# Altium PCB DS-1+.PcbDoc
Units mm, origin at the board's own origin, x right, y up, seen from the top; angles counter-clockwise.
Board outline 78 x 52 mm, 2 copper layers (Top Layer, Bottom Layer), stack 1.571 mm thick; 54 components, 49 nets, 239 pads, 49 vias.
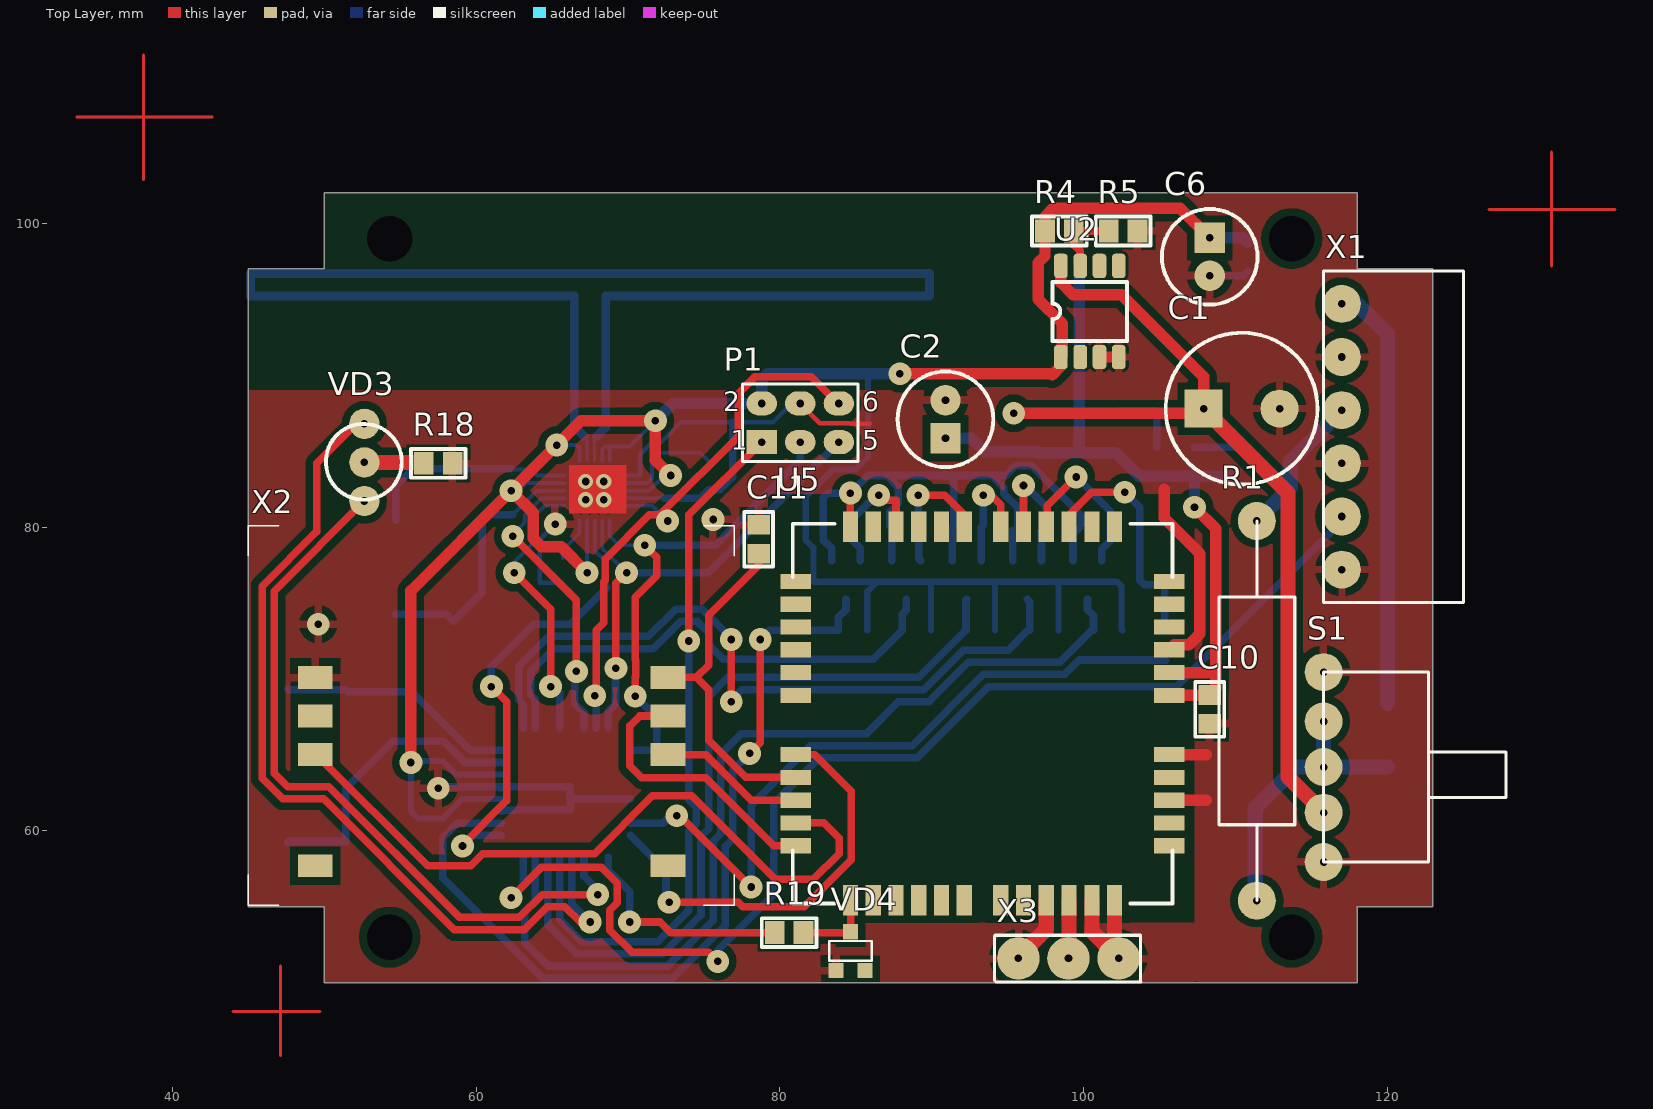
[diagram p0: Top Layer view]
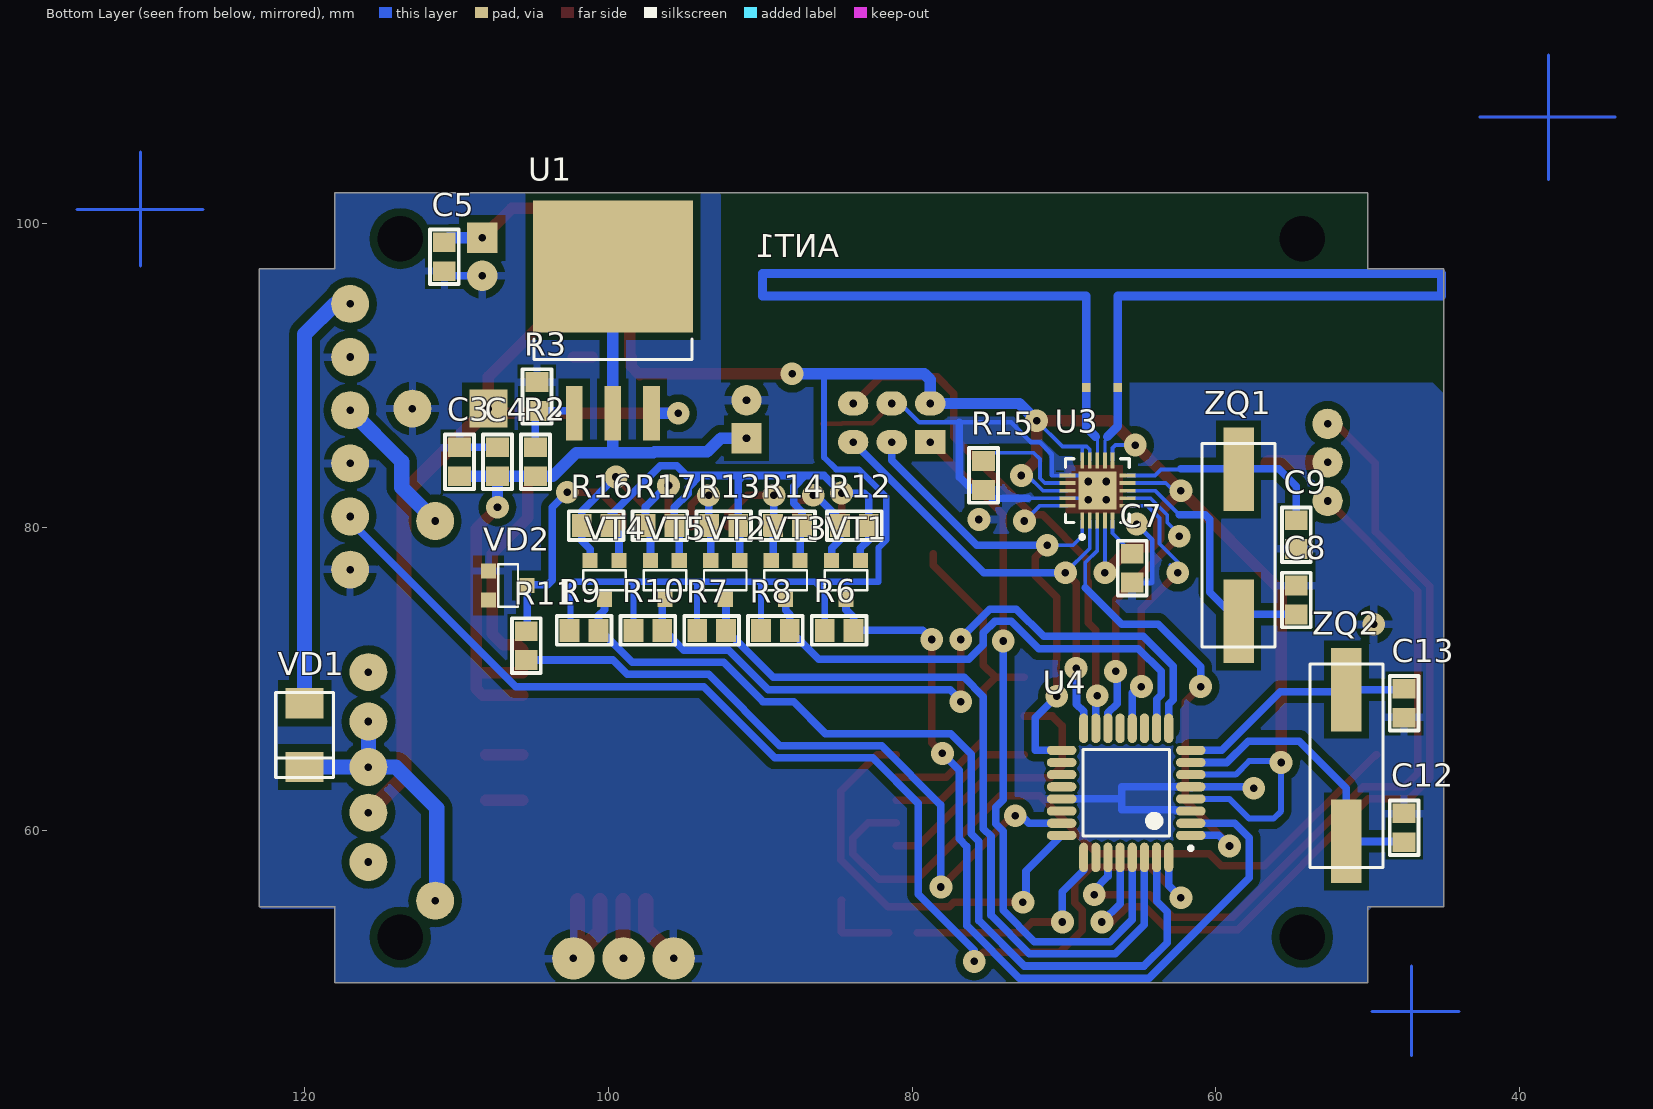
[diagram p1: Bottom Layer view, seen from below]

## Layer stack, top to bottom
Top Layer: signal copper 0.0356
Dielectric: core 1.5, FR-4, Dk 4.8
Bottom Layer: signal copper 0.0356

## Board outline
45,55 45,97 50,97 50,102 118,102 118,97 123,97 123,55 118,55 118,50 50,50 50,55

## Design rules (kind name [scope] priority, off if disabled: settings)
Clearance "Clearance_GND_VCC +3.3" [InNet('GND') vs InNet('VCC +3.3')] p1 off: gap=0.2
Clearance Clearance_U3_Trace [(IsTrack  And IsNet)  And InRegion(2421,2917 ,2905 ,3480) vs (IsTrack  And IsNet)  And InRegion(2421,2917 ,2905 ,3480)] p2: gap=0.2
Clearance Clearance_QFP_NET [InNet('SPI_MISO','SPI_MOSI','GND','VCC +3.3','TR_GDO2','TR_GDO0','SPI_SS','SPI_SCK','NetC8_1','NetC9_1','')  And InRegion(2421,2917 ,2905 ,3480) vs InNet('SPI_MISO','SPI_MOSI','GND','VCC +3.3','TR_GDO2','TR_GDO0','SPI_SS','SPI_SCK','NetC8_1','NetC9_1')  And InRegion(2421,2917 ,2905 ,3480)] p3: gap=0.2
Clearance Clearance_QFP_Pins [InComponent('U3','U4','U2') And IsPad] p4: gap=0.2
Clearance Clearance_GND [InPolygon] p5: gap=0.5
Clearance [All] p6: gap=0.3
ComponentClearance ComponentClearance_R1_C10 [InComponent('C10') vs InComponent('R1')] p1: gap=0 collisioncheckmode=3 verticalgap=0 showdistances=FALSE
ComponentClearance [All] p2: gap=0.3 collisioncheckmode=3 verticalgap=0.3 showdistances=FALSE
HoleSize [All] p1: absolutevalues=TRUE maxlimit=5 minlimit=0.3 maxpercent=80.000 minpercent=20.000
NetAntennae [All] p1: netantennaetolerance=50
PlaneConnect [All] p1: planeconnectstyle=Relief reliefexpansion=0.508 reliefentries=4 reliefconductorwidth=0.3 reliefairgap=0.3
PolygonConnect [All] p1: connectstyle=Relief reliefconductorwidth=0.5 reliefentries=4 polygonreliefangle="90 Angle"
RoutingCorners [All] p1: cornerstyle=45-Degree minsetback=2.54 maxsetback=5
RoutingVias [All] p1: holewidth=0.5 width=1.6 viastyle="Through Hole" minholewidth=0.3 minwidth=1.5 maxholewidth=1 maxwidth=2
ShortCircuit ShortCircuit_ANT1 [InComponent('ANT1')] p1: allowed=TRUE
ShortCircuit [All] p2: allowed=FALSE
SilkToSilkClearance [All] p1: silktosilkclearance=0.3
SilkscreenOverComponentPads [All] p1: minsilkscreentomaskgap=0.254
SolderMaskExpansion [All] p1: expansion=0.102
Width [All] p1: maxlimit=5 minlimit=0.2 preferedwidth=0.3
20 further rules are at their usual default settings.

## Components (designator, comment, footprint, x,y, rotation, side; value= is the part's Value field where it differs from the comment)
ANT1 "DIPOL 2.4GHz" ANT_DIPOL_2.4GHZ 67.495,89.8 r0 bottom
C1 "K50-35" CAP_POL_D10 110.4,87.8 r0 top
C2 "K50-35" CAP_POL_D6.3 90.9,87.1 r90 top
C3 "KONDENS_SMD" C0805 109.8,84.3 r90 bottom
C4 "KONDENS_SMD" C0805 107.3,84.3 r90 bottom
C5 "KONDENS_SMD" C0805 110.8,97.8 r270 bottom
C6 "K50-35" CAP_POL_D6.3 108.3,97.8 r270 top
C7 "KONDENS_SMD" C0805 65.5,77.3 r270 bottom
C8 "KONDENS_SMD" C0805 54.7,75.2 r90 bottom
C9 "KONDENS_SMD" C0805 54.7,79.5 r270 bottom
C10 "KONDENS_SMD" C0805 108.3,68 r270 top
C11 "KONDENS_SMD" C0805 78.6,79.2 r270 top
C12 "KONDENS_SMD" C0805 47.6,60.2 r90 bottom
C13 "KONDENS_SMD" C0805 47.6,68.4 r270 bottom
P1 "Header 3X2" HDR2X3 78.8,85.6 r0 top
R1 "KNP-200" "RESISTOR KNP-200" 111.4,80.4 r270 top
R2 "RES" C0805 104.8,84.3 r270 bottom
R3 "RES" C0805 104.7,88.6 r270 bottom
R4 "RES" C0805 98.4,99.5 r180 top
R5 "RES" C0805 102.6,99.5 r180 top
R6 "RES" C0805 84.8,73.2 r180 bottom
R7 "RES" C0805 93.2,73.2 r180 bottom
R8 "RES" C0805 89,73.2 r180 bottom
R9 "RES" C0805 101.6,73.2 r180 bottom
R10 "RES" C0805 97.4,73.2 r180 bottom
R11 "RES" C0805 105.4,72.2 r270 bottom
R12 "RES" C0805 83.8,80.1 r0 bottom
R13 "RES" C0805 92.4,80.1 r0 bottom
R14 "RES" C0805 88.2,80.1 r0 bottom
R15 "RES" C0805 75.3,83.4 r90 bottom
R16 "RES" C0805 100.8,80.1 r0 bottom
R17 "RES" C0805 96.6,80.1 r0 bottom
R18 "RES" C0805 57.5,84.2 r0 top
R19 "RES" C0805 80.6,53.3 r0 top
S1 "SS12F23" SS12F23 115.8,64.2 r270 top
U1 "LM1086CS-ADJ" TS3B_M 99.7,93.6 r90 bottom
U2 "LP2951" SOIC-8 98.5,91.2 r90 top
U3 "CC2500" VQFN20 67.8,82.4 r90 bottom
U4 "ATmega8A-AU" 32A_M 65.9,62.5 r0 bottom
U5 "WISMO 228" WISMO 81,76.4 r0 top
VD1 "10BQ100" SMB 120,66.3 r90 bottom
VD2 "BZX84C2V7" SOT23 107.9,77.1 r270 bottom
VD3 "LIGHTDIODE2" LIGHTDIODE2 52.6,84.3 r90 top
VD4 "BZX84C2V7" SOT23 83.7,50.8 r0 top
VT1 "BSS138-SOT23" SOT23 83.4,77.8 r0 bottom
VT2 "BSS138-SOT23" SOT23 91.35,77.8 r0 bottom
VT3 "BSS138-SOT23" SOT23 87.375,77.8 r0 bottom
VT4 "BSS138-SOT23" SOT23 99.3,77.8 r0 bottom
VT5 "BSS138-SOT23" SOT23 95.325,77.8 r0 bottom
X1 "15EDGRC-3.5-06P" 15EDGRC-3.5-06P 117,94.7 r270 top locked
X2 "MOLEX91228-0001" MOLEX91228-0001 73,70.1 r180 top locked
X3 "ANT-Healder" ANT-HEALDER 99,51.6 r180 top
ZQ1 "HC-49SMD" HC-49SMD 58.5,78.8 r90 bottom
ZQ2 "HC-49SMD" HC-49SMD 51.4,64.3 r90 bottom

## Footprints (in the part's own frame and the unit in brackets; to place one, negate y for a bottom-side part, rotate by r counter-clockwise, add the part's x,y. Pads: shape width x height; smd on the part's side, far side on the other; paste and mask are expansions set on the pad)
15EDGRC-3.5-06P [mm]
  round 2.5 hole 0.5: 1(0,0) 2(3.5,0) 3(7,0) 4(10.5,0) 5(14,0) 6(17.5,0)
  silkscreen extent -2.15,-1.2 19.65,8, body extent -2.1,-1.2 19.6,8, height 7
32A_M [mm] "Thin QFP, 32-Leads, Body 7x7mm, Pitch 0.8mm, IPC Low Density"
  oval 1.95x0.6 smd: 1(-4.25,2.8) 2(-4.25,2) 3(-4.25,1.2) 4(-4.25,0.4) 5(-4.25,-0.4) 6(-4.25,-1.2) 7(-4.25,-2) 8(-4.25,-2.8) 17(4.25,-2.8) 18(4.25,-2) 19(4.25,-1.2) 20(4.25,-0.4) 21(4.25,0.4) 22(4.25,1.2) 23(4.25,2) 24(4.25,2.8)
  oval 0.6x1.95 smd: 9(-2.8,-4.25) 10(-2,-4.25) 11(-1.2,-4.25) 12(-0.4,-4.25) 13(0.4,-4.25) 14(1.2,-4.25) 15(2,-4.25) 16(2.8,-4.25) 25(2.8,4.25) 26(2,4.25) 27(1.2,4.25) 28(0.4,4.25) 29(-0.4,4.25) 30(-1.2,4.25) 31(-2,4.25) 32(-2.8,4.25)
  silkscreen extent -4.37,-2.85 2.85,3.77, body extent -3.5,-3.5 3.5,3.5, height 1.2
ANT-HEALDER [mm]
  round 2.8 hole 0.5: 1(0,0) 2(-3.3,0) 3(3.3,0)
  silkscreen extent -4.78,-1.53 4.87,1.55
ANT_DIPOL_2.4GHZ [mm]
  rect 0.58x0.58 smd: 1(-1.037,0.6) 2(1.037,0.6)
  Top Layer lines w0.58: -1.037,0.6 -1.037,-5.425 -22.35,-5.425 -22.35,-6.9 22.35,-6.9 22.35,-5.425 1.037,-5.425 1.037,0.6
C0805 [mm]
  rect 1.3x1.5 smd: 1(-0.95,0) 2(0.95,0)
  silkscreen extent -1.8,-0.95 1.8,0.95
CAP_POL_D6.3 [mm]
  rect 2x2 hole 0.5: 1(-1.25,0)
  round 2 hole 0.5: 2(1.25,0)
  silkscreen extent -3.15,-3.15 3.15,3.15, body extent -3.13,-3.14 3.15,3.14, height 11
CAP_POL_D10 [mm]
  rect 2.5x2.5 hole 0.5: 1(-2.5,0)
  round 2.5 hole 0.5: 2(2.5,0)
  silkscreen extent -5,-5 5,5, body extent -4.96,-4.99 5,4.99, height 20
HC-49SMD [mm]
  rect 5.5x2 smd: 1(-5,0) 2(5,0)
  silkscreen extent -6.7,-2.4 6.7,2.4, body extent -6.7,-2.4 6.7,2.4, height 4
HDR2X3 [mm] "Connector; Header; 3x2 Position"
  rect 2x1.6 hole 0.5: 1(0,0)
  oval 2x1.6 hole 0.5: 2(0,2.54) 3(2.54,0) 4(2.54,2.54) 5(5.08,0) 6(5.08,2.54)
  silkscreen extent -1.27,-1.27 6.35,3.81
LIGHTDIODE2 [mm]
  round 2 hole 0.5: 1(-0.04,-0.04) 2(-2.58,-0.04) 3(2.5,-0.04)
  silkscreen extent -2.5,-2.5 2.5,2.5
MOLEX91228-0001 [mm]
  rect 2.3x1.5 smd: 1(0.38,0) 2(0.38,2.54) 3(0.38,5.08) 4(23.6,0) 5(23.6,2.54) 6(23.6,5.08) 7(23.6,12.4) 8(0.38,12.4)
  silkscreen extent -4,-10 28,15
"RESISTOR KNP-200" [mm]
  round 2.5 hole 0.5: 1(0,0) 2(25,0)
  silkscreen extent 0,-2.5 25,2.5
SMB [mm]
  rect 2x2.5 smd: 1(-2.1,0) 2(2.1,0)
  silkscreen extent -2.8,-1.9 2.8,1.9
SOIC-8 [mm]
  rrect50% 1.6x0.9 smd: 1(0,0) 2(0,-1.27) 3(0,-2.54) 4(0,-3.81) 5(6,-3.81) 6(6,-2.54) 7(6,-1.27) 8(6,0)
  silkscreen extent 1.05,-4.36 4.95,0.55
SOT23 [mm]
  rect 1x1 smd: 1(0,0) 2(1.9,0) 3(0.95,2.55)
  silkscreen extent -0.45,0.65 2.35,1.95
SS12F23 [mm]
  round 2.5 hole 0.5: 1(-3,0) 2(0,0) 3(3,0) 4(6.25,0) 5(-6.25,0)
  silkscreen extent -6.25,0 6.25,12
TS3B_M [mm] "D2-PAK, 4-Leads, Body 8.6x10.2mm, Pitch 2.54mm, Lead Span 14.2mm, IPC Low Density"
  rect 3.6x1.1 smd: 1(-6.1,2.54) 2(-6.1,0) 3(-6.1,-2.54)
  rect 8.7x10.55 smd: 4(3.55,0)
  silkscreen extent -6.22,-5.2 -1.2,5.2, body extent -2.55,-5.2 6.34,5.2, height 4.64
VQFN20 [mm] "QFN, 20-Leads, Body 4,2x4,2mm (max), Pitch 0,50mm, IPC Low Density"
  rect 1.05x0.25 smd: 1(-1.975,1) 2(-1.975,0.5) 3(-1.975,0) 4(-1.975,-0.5) 5(-1.975,-1) 11(1.975,-1) 12(1.975,-0.5) 13(1.975,0) 14(1.975,0.5) 15(1.975,1)
  rect 0.25x1.05 smd: 6(-1,-1.975) 7(-0.5,-1.975) 8(0,-1.975) 9(0.5,-1.975) 10(1,-1.975) 16(1,1.975) 17(0.5,1.975) 18(0,1.975) 19(-0.5,1.975) 20(-1,1.975)
  rect 2.5x2.5 smd: 21(0,0)
  silkscreen extent -3.17,-2.1 2.1,2.1, body extent -2.07,-2.07 2.07,2.07, height 0.8
WISMO [mm]
  rect 2x1 smd: 1(0.04,0.02) 2(0.04,-1.48) 3(0.04,-2.98) 4(0.04,-4.48) 5(0.04,-5.98) 6(0.04,-7.48) 7(0.04,-11.38) 8(0.04,-12.88) 9(0.04,-14.38) 10(0.04,-15.88) 11(0.04,-17.38) 24(24.64,-17.38) 25(24.64,-15.88) 26(24.64,-14.38) 27(24.64,-12.88) 28(24.64,-11.38) 29(24.64,-7.48) 30(24.64,-5.98) 31(24.64,-4.48) 32(24.64,-2.98) 33(24.64,-1.48) 34(24.64,0.02)
  rect 1x2 smd: 12(3.64,-20.98) 13(5.14,-20.98) 14(6.64,-20.98) 15(8.14,-20.98) 16(9.64,-20.98) 17(11.14,-20.98) 18(13.54,-20.98) 19(15.04,-20.98) 20(16.54,-20.98) 21(18.04,-20.98) 22(19.54,-20.98) 23(21.04,-20.98) 35(21.04,3.62) 36(19.54,3.62) 37(18.04,3.62) 38(16.54,3.62) 39(15.04,3.62) 40(13.54,3.62) 41(11.14,3.62) 42(9.64,3.62) 43(8.14,3.62) 44(6.64,3.62) 45(5.14,3.62) 46(3.64,3.62)
  silkscreen extent -0.16,-21.18 24.84,3.82, body extent -0.1,-21.2 24.8,3.8, height 2.8

## Part data
ANT1: library part ANT_dipol_2.4GHz
C1: library part "Capasitor_pol D10"
C2 C6: library part "Capasitor_pol D6.3"
P1: "Header, 3-Pin, Dual row"
R1: library part "Resistor 2W"
R2 R3 R4 R5 R6 R7 R8 R9 R10 R11 R12 R13 R14 R15 R16 R17 R18 R19: "Resistor"
U1: "1.5A Low Dropout Positive Regulators, 3-pin TO-263"
U4: "8-bit AVR Microcontroller, 8KB Flash, 512 Bytes EEPROM, 1KB SRAM, 32-pin TQFP, Industrial Grade (-40°C to 85°C)"
X3: library part ANT_HELDER

## Free pads (board coordinates)
  round 0 hole 3 unplated: 0(54.3,99) 1(54.3,53) 2(113.7,99) 3(113.7,53)

## Via types
v1: diameter 1.5, hole 0.5, Top Layer to Bottom Layer, 45 vias
v2: diameter 1, hole 0.5, Top Layer to Bottom Layer, tented top, 4 vias

## Nets (pads, with @x,y where several pads share a name; then routed paths per layer and width w, separated by ;. In a path a pad name is that pad's centre, name@x,y a point inside that pad or via, vN(x,y) a via of type N, cw(c..) or ccw(c..) an arc to the next point about the centre after c; other vN are vias at no path point)
CTS: R8.2 U4.10 VT3.3 | length 34.1
  Bottom Layer w0.5: U4.10 63.9,68.661 63.6,68.961 63.6,70.5 65.1,72 71.662,72 73.462,73.8 74.538,73.8 75.3,73.038 75.3,72.262 76.262,71.3 86.15,71.3 R8.2 88.05,74.25 88.325,74.525 VT3.3
DTR: R6.2 U4.2 VT1.3 | length 57.1
  Top Layer w0.5: v1(78,65.1) 78.7,65.8 v1(78.7,72.6)
  Bottom Layer w0.5: U4.2 58.762,60.5 57.8,59.538 57.8,56.899 64.399,50.3 72.932,50.3 76.4,53.767 76.4,58.967 76.9,59.467 76.9,64 v1(78,65.1) ; v1(78.7,72.6) 79.3,73.2 R6.2 83.85,74.05 84.35,74.55 VT1.3
GND: C1.2 C2.2 C3.2 C4.2 C5.2 C6.2 C7.2 C8.2 C9.2 C10.2 C11.1 C12.2 C13.2 P1.4 R3.1 R5.1 R15.1 R18.2 S1.4 S1.5 U2.3 U2.4 U3.16 U3.19 U3.21 U4.3 U4.5 U4.21 U5.20 U5.22 U5.23 U5.26 U5.28 U5.31 VD2.1 VD4.1 X1.2 X1.4 X1.6 X2.4 X3.2 X3.3 | length 94.6
  Top Layer w0.3: P1.4 82.63,86.85 84.598,86.85 84.648,86.8 85.9,86.8
  Top Layer w0.75: U2.3 U2.4 ; 105.3,82.5 105.3,80.6 107.65,78.25 107.65,72.975 106.92,72.245 105.965,72.245 U5.31 ; U5.26 108.08,62.02 ; U5.28 108.08,65.02
  Top Layer w1: X3.3 95.7,51.7 97.54,53.54 U5.20 ; U5.22 100.54,53.36 X3.2@102.04,51.86 ; U5.23 X3.2@102.04,51.86 ; X3.2 X3.2@102.04,51.86
  Bottom Layer w0.25: U3.21@68.3,81.9 U3.19 72.4,81.9 ; U3.21@68.8,83.4 U3.16 70.8,83.4
  Bottom Layer w0.3: v1(65.2,80.2) 64.175,79.175 64.175,76.325 65.475,76.325 C7.2 ; 66.2,62.15 66.25,62.1 ; 70.8,83.4 70.8,84.8 71.6,85.6 72.183,85.6 73.483,86.9 76.9,86.9 78.072,86.9 78.082,86.89 79.518,86.89 80.768,88.14 P1.4
  Bottom Layer w0.5: v1(57.5,62.8) 57.6,62.9 U4.5 ; U4.5@61.6,62.85 U4.5 ; U4.3 61.7,61.35 62.636,61.35 62.686,61.4 66.2,61.4 66.2,62.15 66.2,62.9 U4.5 ; 66.25,62.1 U4.21 ; 72.4,81.9 74.75,81.9 R15.1 76.05,82.45 76.9,83.3 76.9,86.9 ; C4.2 C3.2 ; C6.2 110.5,96.55 C5.2
  other v1: 49.6,73.6 75.6,80.5
  other v2: 67.2,81.8 68.4,81.8 67.2,83 68.4,83
NetANT1_1: 
NetANT1_2: ANT1.1 ANT1.2 U3.12 U3.13 | length 10.3
  Bottom Layer w0.2: 67.15,85.95 67.15,85.85 67.3,85.7 U3.12 ; U3.13 67.8,85.834 67.912,85.946
  Bottom Layer w0.58: ANT1.1 66.458,86.642 67.15,85.95 ; 67.912,85.946 68.532,86.566 ANT1.2
NetC1_1: C1.1 S1.3 U1.3 U2.8 | length 59.4
  Top Layer w0.75: v1(95.4,87.5) 107.6,87.5 C1.1 107.9,89.9 102.5,95.3 99.3,95.3 98.5,96.1 U2.8
  Top Layer w1: C1.1 113.45,82.25 113.45,63.55 S1.3
  Bottom Layer w0.75: v1(95.4,87.5) U1.3
NetC7_1: C7.1 U3.5 | length 2.9
  Bottom Layer w0.25: C7.1@65.7,77.95 65.7,78.5 66.8,79.6 U3.5
NetC8_1: C8.1 U3.8 ZQ1.1 | length 17.8
  Bottom Layer w0.25: 62.4,80.8 64,82.4 U3.8
  Bottom Layer w0.5: C8.1 58.05,74.25 ZQ1.1 ; ZQ1.1@58.5,73.9 ZQ1.1 ; 62.4,80.8 60.7,80.8 60.4,80.5 60.4,75.7 ZQ1.1
NetC9_1: C9.1 U3.10 ZQ1.2 | length 14
  Bottom Layer w0.25: 62.3,83.85 62.35,83.8 63.6,83.8 64,83.4 U3.10
  Bottom Layer w0.5: C9.1 54.7,82.7 55.85,83.85 62.3,83.85
NetC11_2: C11.2 U5.8 X2.1 | length 22.9
  Top Layer w0.5: X2.1 74.5,70.1 ; C11.2 78.6,77.5 75.3,74.2 75.3,70.9 74.5,70.1 ; U5.8 77.742,63.52 75.3,65.962 75.3,69.3 74.5,70.1
NetC12_1: C12.1 U4.7 ZQ2.1 | length 19.6
  Bottom Layer w0.5: C12.1 47.65,59.3 ZQ2.1 ; ZQ2.1@51.45,59.25 ZQ2.1 ; ZQ2.1@51.45,59.35 ZQ2.1 ; U4.7 59.269,64.5 57.869,65.9 54.5,65.9 51.4,62.8 ZQ2.1
NetC13_1: C13.1 U4.8 ZQ2.2 | length 15.7
  Bottom Layer w0.5: C13.1 47.65,69.3 ZQ2.2 51.55,69.15 55.761,69.15 56.7,68.211 56.7,68.2 59.6,65.3 U4.8
NetR1_1: R1.1 X1.3 | length 9.6
  Bottom Layer w1: R1.1 113.6,82.6 113.6,84.3 X1.3
NetR1_2: R1.2 S1.1 S1.2 VD1.1 | length 19
  Bottom Layer w1: R1.2 111.3,55.5 111.3,61.5 114,64.2 S1.2 ; S1.1 S1.2 ; VD1.1 S1.2
NetR2_1: R2.1 R3.2 U1.1 | length 5
  Bottom Layer w0.5: U1.1 102.39,87.65 R3.2 104.8,87.55 R2.1
NetR4_1: R4.1 R5.2 U2.7 | length 4.8
  Top Layer w0.5: U2.7 99.77,98.18 99.35,98.6 R4.1 R5.2
NetR11_1: R11.1 U5.37 VD2.3 | length 16.1
  Top Layer w0.5: U5.37 99.04,80.798 100.542,82.3 v1(102.7,82.3)
  Bottom Layer w0.5: v1(102.7,82.3) 103.7,81.3 103.7,76.5 104,76.2 105.3,76.2 VD2.3 105.35,73.2 R11.1
NetR12_1: R12.1 R13.1 R14.1 R16.1 R17.1 U5.46 VT1.1 VT2.1 VT3.1 VT4.1 VT5.1 | length 47
  Top Layer w0.5: U5.46 v1(84.64,82.24)
  Bottom Layer w0.5: VT1.1 83.4,78.6 82.85,79.15 R12.1 82.85,81.95 83.14,82.24 v1(84.64,82.24) 85.8,83.4 87.038,83.4 ; VT3.1 87.375,79.975 R14.1 87.25,81.012 87.8,81.561 87.8,82.7 87.738,82.7 87.038,83.4 ; VT2.1 91.35,80 R13.1 91.45,83.05 91.1,83.4 ; VT5.1 R17.1@95.325,79.775 ; R17.1 95.65,81.292 94.74,82.202 94.74,82.598 93.938,83.4 ; VT4.1 99.3,79.55 R16.1 99.85,80.768 96.578,84.04 95.502,84.04 94.862,83.4 93.938,83.4 ; 87.038,83.4 91.1,83.4 ; 91.1,83.4 92.861,83.4 93.938,83.4
NetR12_2: R12.2 U5.44 VT1.2 | length 8.4
  Top Layer w0.5: v1(86.5,82.1) 86.84,81.76 87.64,81.76 U5.44
  Bottom Layer w0.5: VT1.2 85.3,78.6 84.75,79.15 R12.2 84.75,80.512 86.338,82.1 v1(86.5,82.1)
NetR13_2: R13.2 U5.40 VT2.2 | length 7.3
  Top Layer w0.5: v1(93.4,82.1) 93.4,82 94.022,82 94.54,81.482 U5.40
  Bottom Layer w0.5: VT2.2 93.25,80 R13.2 93.4,80.15 v1(93.4,82.1)
NetR14_2: R14.2 U5.41 VT3.2 | length 8.7
  Top Layer w0.5: v1(89.1,82.1) 90.838,82.1 92.14,80.798 U5.41
  Bottom Layer w0.5: v1(89.1,82.1) 89.1,80.15 R14.2 89.15,77.925 VT3.2
NetR15_2: R15.2 U3.17 | length 7.3
  Bottom Layer w0.25: U3.17 71.264,82.9 71.582,83.218 71.582,84.482 72,84.9 74.75,84.9 R15.2
NetR16_2: R16.2 U5.38 VT4.2 | length 10.8
  Top Layer w0.5: U5.38 97.6,80.08 97.6,81.4 v1(99.5,83.3)
  Bottom Layer w0.5: v1(99.5,83.3) 101.75,81.05 R16.2 ; VT4.2 101.2,78.55 101.75,79.1 R16.2 ; R16.2@101.8,80.15 R16.2
NetR17_2: R17.2 U5.39 VT5.2 | length 8.5
  Top Layer w0.5: U5.39 v1(96.04,82.74)
  Bottom Layer w0.5: v1(96.04,82.74) 96.1,82.8 97.55,81.35 R17.2 97.225,79.775 VT5.2
NetR18_1: R18.1 VD3.1 | length 3.9
  Top Layer w1: VD3.1 56.49,84.26 R18.1
NetR19_2: R19.2 U5.12 VD4.3 | length 5.2
  Top Layer w0.5: R19.2 84.6,53.3 VD4.3 84.65,55.41 U5.12
NetU4_27: U4.27 VD3.2 | length 49.1
  Top Layer w0.5: VD3.2 46.7,75.78 46.7,63.8 47.6,62.9 50.3,62.9 58.9,54.3 62.838,54.3 64.338,55.8 v1(68,55.8)
  Bottom Layer w0.5: U4.27 67.1,57 68,56.1 v1(68,55.8)
NetU4_28: U4.28 VD3.3 | length 58
  Top Layer w0.5: VD3.3 52.1,86.8 49.5,84.2 49.5,79.711 45.9,76.111 45.9,63.469 47.269,62.1 49.969,62.1 58.569,53.5 63.17,53.5 64.67,55 65.838,55 66.838,54 v1(67.5,54)
  Bottom Layer w0.5: U4.28 66.3,55.2 v1(67.5,54)
NetU4_32: U4.32 X1.5 | length 79.8
  Top Layer w0.5: v1(62.3,55.6) 64.3,57.6 68.238,57.6 69.3,56.538 69.3,55.262 68.8,54.762 68.8,53.462 70.262,52 75.3,52 75.4,51.9 v1(75.9,51.4)
  Bottom Layer w0.5: v1(62.3,55.6) 63.1,56.4 U4.32 ; v1(75.9,51.4) 75.9,52.136 79.6,55.836 79.6,61.8 82.6,64.8 89.031,64.8 93.731,69.5 106.1,69.5 117,80.4 X1.5
NetU5_9: U5.9 X2.3 | length 9.7
  Top Layer w0.5: X2.3 72.64,65 75.13,65 78.11,62.02 U5.9
NetU5_10: U5.10 X2.6 | length 46.9
  Top Layer w0.5: X2.6@49.52,64.9 X2.6 49.48,65.02 56.8,57.7 59.638,57.7 60.438,58.5 67.8,58.5 71.6,62.3 74.2,62.3 79.7,56.8 82.2,56.8 83.9,58.5 83.9,59.5 82.88,60.52 U5.10
NetU5_11: U5.11 X2.2 | length 18.5
  Top Layer w0.5: X2.2 70.76,67.56 70.1,66.9 70.1,64.3 70.9,63.5 75.1,63.5 79.58,59.02 U5.11
NetU5_21: U5.21 X3.1 | length 3.8
  Top Layer w1: X3.1 99.04,51.64 U5.21
NetVD1_2: VD1.2 X1.1 | length 28.1
  Bottom Layer w1: X1.1 118,94.7 120,92.7 VD1.2
ON/OFF: R11.2 U4.23 | length 46.9
  Top Layer w0.5: v1(73.2,61) 73.4,61 v1(78.1,56.3)
  Bottom Layer w0.5: U4.23 72.3,60.5 73,61.2 v1(73.2,61) ; v1(78.1,56.3) 78.1,61.7 82,65.6 88.7,65.6 93.4,70.3 98.759,70.3 99.709,71.25 R11.2
READY: U4.24 U5.7 | length 28
  Top Layer w0.5: v1(72.7,55.3) 77.262,55.3 77.562,55 81.601,55 84.7,58.099 84.7,61.1 84.7,62.6 82.28,65.02 U5.7
  Bottom Layer w0.5: U4.24 72.5,57.35 72.5,55.5 v1(72.7,55.3)
RESET: R19.1 U4.25 | length 14.7
  Top Layer w0.5: v1(70.1,54) 72.1,54 72.8,53.3 R19.1
  Bottom Layer w0.5: U4.25 68.7,57.4 70.1,56 v1(70.1,54)
RESET_MCU: P1.1 U4.29 | length 47.4
  Top Layer w0.5: v1@73.9,72.6 v1(74,72.5) 74,80.8 P1.1
  Bottom Layer w0.5: U4.29 65.5,54.161 66.961,52.7 68.038,52.7 ; 68.038,52.7 71.938,52.7 74,54.762 74,59.962 74.5,60.462 74.5,61.538 74,62.038 v1(74,72.5)
RTS: R10.2 U4.9 VT5.3 | length 48.7
  Top Layer w0.5: v1(76.8,68.5) v1(76.8,72.6)
  Bottom Layer w0.5: U4.9 63.1,68.33 62.8,68.63 62.8,70.831 64.769,72.8 71.33,72.8 73.13,74.6 74.87,74.6 76.8,72.67 v1(76.8,72.6) ; v1(76.8,68.5) 76.7,68.5 77.5,69.3 89.481,69.3 92.081,71.9 95.028,71.9 96.328,73.2 R10.2 96.45,75.075 VT5.3
RXD: R7.2 U4.30 VT2.3 | length 51.8
  Bottom Layer w0.5: U4.30 64.7,53.83 66.63,51.9 72.27,51.9 74.8,54.43 74.8,59.63 75.3,60.13 75.3,68.838 76.562,70.1 89.15,70.1 R7.2 92.25,75.2 VT2.3
SPI_MISO: P1.5 U3.2 U4.16 | length 32.4
  Top Layer w0.5: v1(69.2,70.7) 69.2,76.3 v1(69.9,77)
  Bottom Layer w0.25: U3.2 68.3,78.6 v1(69.9,77)
  Bottom Layer w0.5: U4.16 68.7,67.862 69.175,68.337 69.175,70.675 v1(69.2,70.7) ; v1(69.9,77) 75.28,77 P1.5
SPI_MOSI: P1.6 U3.20 U4.15 | length 37.4
  Top Layer w0.5: v1(67.8,68.9) 67.9,69 67.9,73.2 68.4,73.7 68.4,76.403 68.5,76.503 68.5,77.897 71.403,80.8 72.1,80.8 72.2,80.9 77.25,85.95 77.25,88.782 78.358,89.89 82.065,89.89 83.815,88.14 P1.6
  Bottom Layer w0.25: U3.20 71.6,81.4 v1(72.6,80.4)
  Bottom Layer w0.5: v1(67.8,68.9) 67.9,68.8 U4.15
SPI_SCK: P1.3 U3.1 U4.17 | length 34.1
  Top Layer w0.5: v1(70.475,68.86) 70.475,70.137 70.5,70.162 70.5,71.238 70.475,71.263 70.475,75.375 71.9,76.8 71.9,78 v1(71.1,78.8)
  Bottom Layer w0.25: U3.1 68.8,79.4 69.4,78.8 v1(71.1,78.8)
  Bottom Layer w0.5: U4.17 71.9,65.3 71.9,67.435 v1(70.475,68.86) ; v1(71.1,78.8) 75.738,78.8 81.34,84.402 P1.3
SPI_SS: U3.7 U4.14 | length 19.9
  Top Layer w0.5: v1(62.4,79.4) 66.6,75.2 v1(66.6,70.5)
  Bottom Layer w0.25: v1(62.4,79.4) 62.3,79.4 63.2,80.3 63.2,80.8 64.3,81.9 U3.7
  Bottom Layer w0.5: v1(66.6,70.5) 66.8,70.5 66.5,70.2 66.5,68.361 67.1,67.761 U4.14
TR_GDO0: U3.6 U4.12 | length 19.1
  Top Layer w0.5: v1(62.5,77) 64.9,74.6 v1(64.9,69.5) v1@65,69.6
  Bottom Layer w0.25: v1@63,77.5 v1(62.5,77) 62.5,77.7 63.7,78.9 63.7,80.6 64.5,81.4 U3.6
  Bottom Layer w0.5: v1(64.9,69.5) 65,69.6 65.5,69.1 U4.12
TR_GDO2: U3.3 U4.1 | length 30.9
  Top Layer w0.5: v1(59.1,59) 59,59 62,62 62,68.5 v1(61,69.5)
  Bottom Layer w0.25: U3.3 67.8,78.464 68.6,77.664 68.6,76
  Bottom Layer w0.5: v1(59.1,59) 59.8,59.7 U4.1 ; v1(61,69.5) 61,70.8 63.8,73.6 66.2,73.6 68.6,76
TXD: R9.2 U4.31 VT4.3 | length 61.5
  Bottom Layer w0.5: U4.31 63.9,55.362 63.2,54.661 63.2,52.63 64.73,51.1 72.601,51.1 75.6,54.099 75.6,59.299 76.1,59.799 76.1,65.038 77.462,66.4 85.7,66.4 87.8,68.5 89.813,68.5 92.413,71.1 98.428,71.1 100.528,73.2 R9.2 100.65,74.15 100.25,74.55 VT4.3
"VCC +3.3": C5.1 C6.1 P1.2 R4.2 R6.1 R7.1 R8.1 R9.1 R10.1 U2.1 U3.4 U3.9 U3.11 U3.14 U3.15 U3.18 U4.4 U4.6 | length 188.3
  Top Layer w0.25: v1@72.2,83.3 72.7,83.3 v1(72.8,83.4)
  Top Layer w0.75: v1(55.7,64.5) 55.7,75.8 v1(62.3,82.4) ; v1@67.3,77.4 v1(67.3,77) 65.6,78.7 64.3,78.7 63.75,79.25 63.75,80.95 v1(62.3,82.4) ; v1(72.8,83.4) 71.8,84.4 v1(71.8,87) 66.9,87 v1(65.3,85.4) v1(62.3,82.4) ; v1(87.9,90.1) 97.85,90.1 97.925,90.025 98.5,90.6 U2.1 98.6,91.3 98.6,93.4 97,95 97,97.4 97.45,97.85 R4.2 ; R4.2@97.2,99.25 R4.2 ; C6.1 106.35,101 98,101 97.45,100.45 R4.2
  Bottom Layer w0.25: v1(62.3,82.4) 62.8,82.4 63.3,82.9 U3.9 ; v1(65.3,85.4) 66.6,85.4 66.8,85.2 U3.11 ; v1(67.3,77) U3.4 ; U3.14 68.3,85.1 68.5,85.3 68.8,85.3 ; U3.15 68.8,85.3 ; U3.18 71.4,82.4 72.4,83.4 v1(72.8,83.4) ; v1(71.8,87) 70.1,85.3 68.8,85.3
  Bottom Layer w0.4: U4.4 59.1,62.1 57.8,60.8 56.2,60.8 55.7,61.3 v1(55.7,64.5) 55.8,64.6 57.8,64.6 58.7,63.7 U4.6 ; R6.1 85.75,75.75 86.4,76.4 ; 85.8,90.1 85.8,84.6 85,83.8 83.5,83.8 81.7,82 81.7,79.143 82.2,78.643 82.2,76.4 86.4,76.4 ; R8.1 89.95,76.35 90,76.4 ; R7.1 94.15,76.35 94.2,76.4 ; R10.1 98.35,76.35 98.4,76.4 ; R9.1 102.5,73.25 102.5,76.1 102.2,76.4 98.4,76.4 ; 86.4,76.4 90,76.4 ; 90,76.4 94.2,76.4 ; 94.2,76.4 98.4,76.4
  Bottom Layer w0.75: v1(71.8,87) 72.94,88.14 P1.2 78.8,89.7 79.2,90.1 85.8,90.1 v1(87.9,90.1) ; C6.1 110.5,99.05 C5.1
"VCC +4.2V": C2.1 C3.1 C4.1 C10.1 R2.2 U1.2 U1.4 U5.29 U5.30 | length 53.1
  Top Layer w0.75: U5.29 108.27,68.92 C10.1 108.7,69.35 108.7,70.4 ; U5.30 108.68,70.42 108.7,70.4 ; v1(107.3,81.3) 108.7,79.9 108.7,70.4
  Bottom Layer w0.75: C2.1 92.6,85.85 93.485,84.965 96.962,84.965 97.027,84.9 99.7,84.9 ; U1.4 U1.2 99.7,84.9 ; v1(107.3,81.3) C4.1 ; C3.1 C4.1 ; 99.7,84.9 102.115,84.9 103.665,83.35 R2.2 C4.1
pads on no net: U2.2 U2.5 U2.6 U4.11 U4.13 U4.18 U4.19 U4.20 U4.22 U4.26 U5.1 U5.2 U5.3 U5.4 U5.5 U5.6 U5.13 U5.14 U5.15 U5.16 U5.17 U5.18 U5.19 U5.24 U5.25 U5.27 U5.32 U5.33 U5.34 U5.35 U5.36 U5.42 U5.43 U5.45 VD2.2 VD4.2 X2.5 X2.7 X2.8
copper on no net: | length 89
  Top Layer w0.2: 33.7,107 42.6,107 ; 38.1,102.9 38.1,111.1 ; 44,48.1 49.7,48.1 ; 47.1,45.2 47.1,51.1 ; 126.7,100.9 135,100.9 ; 130.8,97.2 130.8,104.7
  Bottom Layer w0.2: 33.7,107 42.6,107 ; 38.1,102.9 38.1,111.1 ; 44,48.1 49.7,48.1 ; 47.1,45.2 47.1,51.1 ; 126.7,100.9 135,100.9 ; 130.8,97.2 130.8,104.7

## Polygon pours and split planes (outlines as drawn)
GND on Top Layer "BOT" (solid, remove dead copper, pour order 10): 79.1,50 79.1,54.047 78.99,54.157 79.209,53.938 107.3,53.938 107.3,50.1 107.4,50
GND on Top Layer "BOT" (solid, remove dead copper, pour order 4): 45,89 92.4,89 92.5,89.1 92.9,89.5 92.9,102 118,102 118,97 123,97 123,55 118,55 118,50 107.5,50 107.3,50.2 107.3,82.2 79.4,82.2 79.2,82 79.2,50 50,50 50,55 45.1,55 45,55.1
GND on Bottom Layer "BOT" (solid, remove dead copper, pour order 6): 45.718,89.5 92.6,89.5 92.6,101.9 92.7,102 118,102 118,97.143 118.143,97 123,97 123,55 122.857,54.857 118,54.857 118,50 50,50 50,54.7 49.7,55 45,55 45,88.782

## Other copper
Top Layer:
  rectangle net GND: 66.1,80.9 69.9,84.1

## Silkscreen, mask and mechanical layers (free items; w line width, h text height)
Top Solder:
  lines w0.2: 33.7,107 42.6,107 ; 38.1,102.9 38.1,111.1 ; 44,48.1 49.7,48.1 ; 47.1,45.2 47.1,51.1 ; 126.7,100.9 135,100.9 ; 130.8,97.2 130.8,104.7
Bottom Solder:
  lines w0.2: 33.7,107 42.6,107 ; 38.1,102.9 38.1,111.1 ; 44,48.1 49.7,48.1 ; 47.1,45.2 47.1,51.1 ; 126.7,100.9 135,100.9 ; 130.8,97.2 130.8,104.7
Mechanical 1:
  lines w0.127: 45,55 45,97 50,97 50,102 118,102 118,97 123,97 123,55 118,55 118,50 50,50 50,55 45,55
  lines w0.2: 33.7,107 42.6,107 ; 38.1,102.9 38.1,111.1 ; 44,48.1 49.7,48.1 ; 47.1,45.2 47.1,51.1 ; 126.7,100.9 135,100.9 ; 130.8,97.2 130.8,104.7

## Text inside footprints (layer, text, board x,y; h text height)
P1: Top Overlay "6" at 85.404,87.632 h1.27; Top Overlay "5" at 85.404,85.092 h1.27; Top Overlay "2" at 76.26,87.632 h1.27; Top Overlay "1" at 76.768,85.092 h1.27